# Altium PCB CM5 Nas.PcbDoc (part 4 of 4)
Units mm, origin at the board's own origin, x right, y up, seen from the top; angles counter-clockwise.
Board outline 152.4 x 101.6 mm, 20 copper layers (F.Cu, F.Mask, B.Cu, B.Mask, In1.Cu, F.SilkS, In2.Cu, B.SilkS, F.Adhes, B.Adhes, F.Paste, B.Paste, Dwgs.User, Cmts.User, Eco1.User, Eco2.User, Edge.Cuts, Margin, B.CrtYd, F.CrtYd); 373 components, 619 nets, 1990 pads, 0 vias.
Unrouted connection lines stored in the file: 1086.
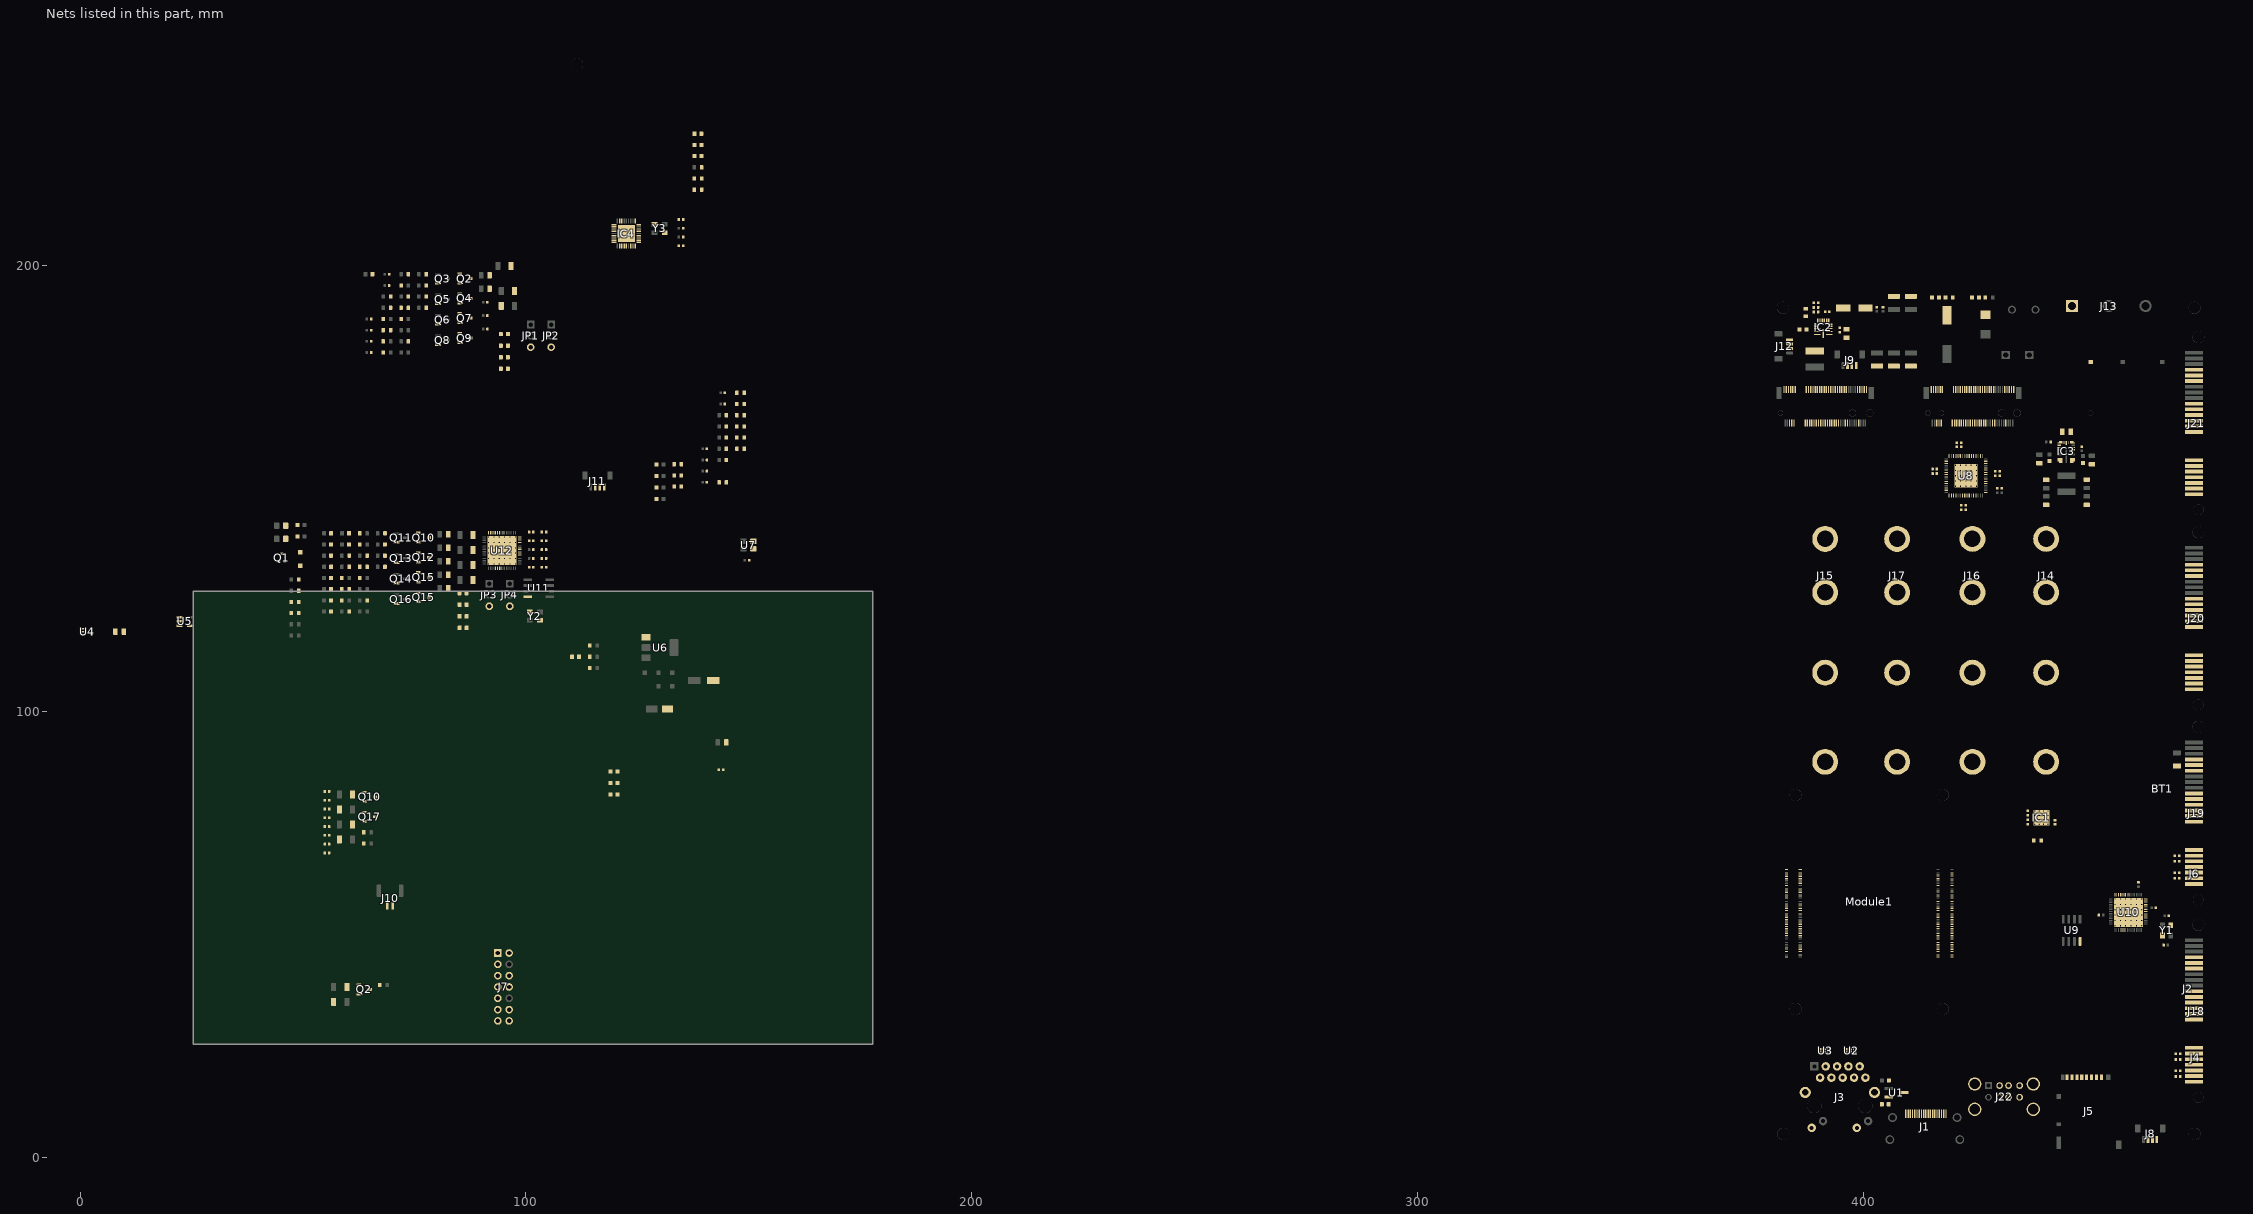
[diagram p13: the nets of this part, all layers, seen from the top]

## Nets (pads, with @x,y where several pads share a name; then routed paths per layer and width w, separated by ;. In a path a pad name is that pad's centre, name@x,y a point inside that pad or via, vN(x,y) a via of type N, cw(c..) or ccw(c..) an arc to the next point about the centre after c; other vN are vias at no path point) (continued)
gnd: BT1.2 C1.2 C2.2 C3.2 C4.2 C5.2 C6.2 C7.2 C8.2 C9.2 C10.2 C11.2 C12.2 C13.2 C14.2 C15.2 C16.2 C17.2 C18.2 C19.2 C20.1 C21.1 C22.2 C23.1 C24.2 C25.2 C26.2 C27.1 C28.2 C29.1 C30.2 C32.2 C34.2 C37.2 C40.2 C41.2 C43.2 C44.2 C45.2 C46.2 C47.2 C48.2 C49.2 C50.2 C51.2 C52.1 C53.2 C54.2 C55.2 C58.2 C59.2 C60.2 C61.2 C62.2 C63.2 C64.2 C69.2 C70.2 C71.2 C72.2 C73.2 C74.2 C77.1 C78.1 C80.2 C81.2 C82.2 C83.2 C84.2 C85.2 C86.2 C87.2 C90.2 C91.2 C92.2 C93.2 C94.2 C95.2 C96.2 C97.2 C98.1@56.86,34.878 C98.2@97.405,194.368 C105.2 C106.1 C107.2 C109.2 C110.2 C111.2 C112.2 C116.2 C117.2 C118.2 C119.2@91.36,188.858 C120.2@65.26,180.568 C121.2 C122.2 C123.2@69.27,195.628 C124.2@101.65,136.348 C125.2 C126.2 C127.1 C134.2 C135.2 C136.1 C137.2 C138.2 C139.2 C140.2 C145.2 C146.2 C147.2 C148.2 C149.2 C150.2 C151.2 C152.2 C153.2 C154.2 C155.2 C156.2 C157.2 C158.2 C159.2 D3.1 D4.1 D5.1 D6.1 D7.1 D8.1 D9.1 D14.1 D15.1 D16.1 D17.1 D18.1 D19.1 D20.1 D21.1 GND1.1 IC1.25 IC1.26 IC1.30 IC1.31 IC1.35 IC1.41 IC2.4 IC2.5 IC2.7 IC2.8 IC2.12 IC2.14 IC3.1 IC3.8 IC3.12 IC3.15 IC3.17 IC3.20 IC4.37 J1.2 J1.5 J1.8 J1.11 J1.17 J2.1 J2.4 J2.7 J2.10 J2.13 J2.16 J2.19 J3.R10 J3.SH J4.2 J5.6 J6.1 J7.1 J7.3 J7.5 J7.7 J7.9 J7.11 J7.13 J8.3 J9.3 J10.2 J11.3 J12.3 J13.1 J14.1 J14.3 J14.9 J14.21 J14.27 J14.33 J14.39 J14.45 J14.51 J14.57 J14.71 J14.73 J14.75 J14.M1 J14.M2 J14.M3 J14.M4 J15.1 J15.3 J15.9 J15.21 J15.27 J15.33 J15.39 J15.45 J15.51 J15.57 J15.71 J15.73 J15.75 J15.M1 J15.M2 J15.M3 J15.M4 J16.1 J16.3 J16.9 J16.21 J16.27 J16.33 J16.39 J16.45 J16.51 J16.57 J16.71 J16.73 J16.75 J16.M1 J16.M2 J16.M3 J16.M4 J17.1 J17.3 J17.9 J17.21 J17.27 J17.33 J17.39 J17.45 J17.51 J17.57 J17.71 J17.73 J17.75 J17.M1 J17.M2 J17.M3 J17.M4 J18.1 J18.4 J18.7 J18.11 J18.13 J18.17 J18.18 J18.19 J19.1 J19.4 J19.7 J19.11 J19.13 J19.17 J19.18 J19.19 J20.1 J20.4 J20.7 J20.11 J20.13 J20.17 J20.18 J20.19 J21.1 J21.4 J21.7 J21.11 J21.13 J21.17 J21.18 J21.19 J22.4 J22.8 JP1.3 JP2.3 JP3.3 JP4.3 Module1.1 Module1.2 Module1.7 Module1.8 Module1.13 Module1.14 Module1.22 Module1.23 Module1.32 Module1.33 Module1.42 Module1.43 Module1.52 Module1.53 Module1.59 Module1.60 Module1.65 Module1.66 Module1.71 Module1.74 Module1.98 Module1.107 Module1.108 Module1.113 Module1.114 Module1.119 Module1.120 Module1.125 Module1.126 Module1.131 Module1.132 Module1.137 Module1.138 Module1.144 Module1.150 Module1.155 Module1.156 Module1.161 Module1.162 Module1.167 Module1.168 Module1.173 Module1.174 Module1.179 Module1.180 Module1.185 Module1.186 Module1.191 Module1.192 Module1.197 Module1.198 Q1.3 Q2.3 Q4.3 Q7.3 Q9.3 Q10.3 Q12.3 Q15.3 Q17.3 R10.2 R13.2 R14.2 R21.2 R22.2 R24.2 R25.2 R26.1 R30.2 R37.2 R38.2 R39.2 R40.2 R41.2 R42.2 R47.2 R52.1 R53.2 R58.2 R65.2 R70.2 R71.1 R76.2 R84.2 R85.1 U1.3 U4.3 U5.2 U6.1 U7.2 U8.53 U8.65 U9.4 U10.56 U10.58 U10.59 U10.65 U11.4 U12.56 U12.58 U12.59 U12.65 Y1.2 Y1.4 Y2.2 Y2.4 Y3.2 Y3.4
GPIO18: Module1.49
GPIO19: Module1.26
GPIO20: Module1.27
GPIO21: Module1.25
GPIO22: Module1.46
GPIO23: Module1.47
GPIO24: Module1.45
GPIO25: J4.6 Module1.41
GPIO26: Module1.24
GPIO27: J4.7 Module1.48
GPIO_VREF: Module1.78 R7.2 R8.2
HDD0_DET: Q2.1 Q4.2 R51.1
HDD1_DET: Q7.2 Q9.1 R56.1
HDD2_DET: Q10.1 Q12.2 R69.1
HDD3_DET: Q15.1@75.84,131.178 Q15.2@75.84,124.678 Q17.1 R74.1@62.705,129.978
HDMI0_CEC: J1.13 Module1.151
HDMI0_CK_N: J1.12 Module1.190
HDMI0_CK_P: J1.10 Module1.188
HDMI0_D0_N: J1.9 Module1.184
HDMI0_D0_P: J1.7 Module1.182
HDMI0_D1_N: J1.6 Module1.178
HDMI0_D1_P: J1.4 Module1.176
HDMI0_D2_N: J1.3 Module1.172
HDMI0_D2_P: J1.1 Module1.170
HDMI0_HOTPLUG: J1.19 Module1.153
HDMI0_SCL: J1.15 Module1.200
HDMI0_SDA: J1.16 Module1.199
HDMI_5v: C2.1 J1.18 U1.2
ID_SC: Module1.35
ID_SD: Module1.36
Net-(C26-Pad1): C26.1 R11.2
Net-(C46-Pad1): C46.1 R27.2
Net-(C47-Pad1): C47.1 R28.2
Net-(C55-Pad1): C55.1 R29.2
Net-(C119-Pad2): C119.2@101.65,140.288
Net-(C120-Pad2): C120.2@101.65,138.318
Net-(C123-Pad2): C123.2@101.65,132.408
Net-(C124-Pad2): C124.2@104.52,140.288
Net-(C129-Pad2): C129.2@104.52,138.318
Net-(C130-Pad2): C130.2@104.52,136.348
Net-(C131-Pad2): C131.2@104.52,134.378
Net-(C132-Pad2): C132.2@104.52,132.408
Net-(D1-K): D1.1 R3.1 TP1.1
Net-(D2-K): D2.1 R4.1 TP2.1
Net-(D3-A): D3.2 R9.1
Net-(D6-A): D6.2 R10.1
Net-(D7-A): D7.2 R16.1
Net-(D8-A): D8.2 R17.1
Net-(D9-A): D9.2 R18.1
Net-(D10-K): D10.1 R46.1
Net-(D11-K): D11.1 R43.1
Net-(D12-K): D12.1 R44.1
Net-(D13-K): D13.1 R45.1
Net-(D14-A): D14.2 R61.2
Net-(D15-A): D15.2 R62.2
Net-(D16-A): D16.2 R63.2
Net-(D17-A): D17.2 R64.2
Net-(D18-A): D18.2 R79.2
Net-(D19-A): D19.2 R80.2
Net-(D20-A): D20.2 R81.2
Net-(D21-A): D21.2 R82.2
Net-(IC1-BST1): C36.1 IC1.12
Net-(IC1-BST2): C33.2 IC1.19
Net-(IC1-BST3): C35.1 IC1.39
Net-(IC1-CMP1): C51.1 IC1.8 R28.1
Net-(IC1-CMP3): C50.1 IC1.3 R27.1
Net-(IC1-COMP2): C22.1 IC1.23 R11.1
Net-(IC1-LX1_1): C36.2 IC1.14 IC1.15 L3.1
Net-(IC1-LX2_1): C33.1 IC1.16 IC1.17 L1.1
Net-(IC1-LX3_1): C35.2 IC1.36 IC1.37 L2.1
Net-(IC1-PGOOD): IC1.27 R12.2
Net-(IC1-RLIM1): IC1.10 R22.1
Net-(IC1-RLIM2): IC1.21 R14.1
Net-(IC1-RLIM3): IC1.1 R21.1
Net-(IC1-ROSC): IC1.6 R26.2
Net-(IC1-SS1): C41.1 IC1.9
Net-(IC1-SS2): C30.1 IC1.22
Net-(IC1-SS3): C40.1 IC1.2
Net-(IC1-V3V): C29.2 IC1.29
Net-(IC1-V7V): C23.2 IC1.28
Net-(IC2-BIAS): C52.2 IC2.13 IC2.16
Net-(IC2-BST): C42.1 IC2.3
Net-(IC2-COMP): C49.1 IC2.15 R29.1
Net-(IC2-FOSC): IC2.17 R30.1
Net-(IC2-LX): C42.2 IC2.6 L4.1
Net-(IC2-{\R\E\S\E\T\}\)\: IC2.2 R23.2
Net-(IC3-CBOOT): C79.2 IC3.3 IC3.4
Net-(IC4-CRFILT): C153.1 C154.1 IC4.14
Net-(IC4-PLLFILT): C158.1 C159.1 IC4.34
Net-(IC4-RBIAS): IC4.35 R85.2
Net-(IC4-USBDM_DN1{slash}PRT_DIS_M1): IC4.1 J22.6
Net-(IC4-USBDM_DN2{slash}PRT_DIS_M2): IC4.3 J22.2
Net-(IC4-USBDP_DN1{slash}PRT_DIS_P1): IC4.2 J22.7
Net-(IC4-USBDP_DN2{slash}PRT_DIS_P2): IC4.4 J22.3
Net-(IC4-VBUS_DET): IC4.27 R83.2
Net-(J3-PadL2): J3.L2 R1.2
Net-(J3-PadL4): J3.L4 R2.2
Net-(J14-DAS{slash}{\D\S\S\}\{\s\l\a\s\h\}\{LED1}): J14.10 R43.2
Net-(J15-DAS{slash}{\D\S\S\}\{\s\l\a\s\h\}\{LED1}): J15.10 R44.2
Net-(J16-DAS{slash}{\D\S\S\}\{\s\l\a\s\h\}\{LED1}): J16.10 R45.2
Net-(J17-DAS{slash}{\D\S\S\}\{\s\l\a\s\h\}\{LED1}): J17.10 R46.2
Net-(J18-P5): J18.12 Q2.2@62.505,36.658 R48.1
Net-(J18-S2): C103.2 J18.2
Net-(J18-S3): C102.2 J18.3
Net-(J18-S5): C101.2 J18.5
Net-(J18-S6): C100.2 J18.6
Net-(J19-P5): J19.12 Q9.2 R60.2
Net-(J19-S2): C115.2 J19.2
Net-(J19-S3): C114.2 J19.3
Net-(J19-S5): C113.2 J19.5
Net-(J19-S6): C108.2 J19.6
Net-(J20-P5): J20.12 Q10.2@63.775,79.838 R66.1
Net-(J20-S2): C132.2@55.825,76.188 J20.2
Net-(J20-S3): C131.2@55.825,78.158 J20.3
Net-(J20-S5): C130.2@55.825,80.128 J20.5
Net-(J20-S6): C129.2@55.825,82.098 J20.6
Net-(J21-P5): J21.12 Q17.2 R78.1
Net-(J21-S2): C144.2 J21.2
Net-(J21-S3): C143.2 J21.3
Net-(J21-S5): C142.2 J21.5
Net-(J21-S6): C141.2 J21.6
Net-(J22-Shield): C157.1 J22.9 R84.1
Net-(Module1A-LED_nACT): Module1.21 R3.2
Net-(Q2-B): Q2.2@85.11,196.148 R49.2@69.615,190.608
Net-(Q3-G): C99.2 Q3.2 Q5.2 R50.2
Net-(Q4-C): Q4.1 R49.1@67.965,188.098 R50.1
Net-(Q6-G): C104.2 Q6.2 Q8.2 R55.2
Net-(Q7-C): Q7.1 R54.1 R55.1
Net-(Q10-B): Q10.2@75.84,138.028 R67.2@60.345,132.488
Net-(Q11-G): C128.2 Q11.2 Q13.2 R68.2
Net-(Q12-C): Q12.1 R67.1@58.695,129.978 R68.1
Net-(Q14-G): C133.2 Q14.2 Q16.2 R73.2
Net-(Q15-B): Q15.2@75.84,129.128 R74.2@64.355,134.998
Net-(Q15-C): Q15.1@75.84,126.728 R72.1 R73.1
Net-(R4-Pad2): R4.2 U4.4
Net-(U2-GND-Pad3): U2.3 U2.8
Net-(U3-GND-Pad3): U3.3 U3.8
Net-(U8-GPIO_0): R35.2 U8.4
Net-(U8-GPIO_1): R31.2 U8.31
Net-(U8-GPIO_2): R38.1 U8.5
Net-(U8-GPIO_3): R34.2 U8.34
Net-(U8-GPIO_4): R37.1 U8.8
Net-(U8-GPIO_5): R32.2 U8.30
Net-(U8-GPIO_6): R39.1 U8.35
Net-(U8-GPIO_7): R33.2 U8.36
Net-(U8-REXT1): R41.1 U8.16
Net-(U8-REXT2): R42.1 U8.49
Net-(U8-TEST_EN): R40.1 U8.33
Net-(U8-TXN_1): C57.2 U8.12
Net-(U8-TXN_2): C66.2 U8.23
Net-(U8-TXN_4): C76.2 U8.58
Net-(U8-TXN_IN): C89.2 U8.55
Net-(U8-TXP_1): C56.2 U8.11
Net-(U8-TXP_2): C65.2 U8.22
Net-(U8-TXP_4): C75.2 U8.57
Net-(U8-TXP_IN): C88.2 U8.54
nPWR_LED: Module1.95 U4.2
nRPIBOOT: J7.2 Module1.93
PCIe_CLK_N_1: J16.53 U8.19
PCIe_CLK_N_2: J17.53 U8.28
PCIe_CLK_N_3: J15.53 U8.45
PCIe_CLK_N_4: J14.53 U8.63
PCIe_CLK_P_1: J16.55 U8.18
PCIe_CLK_P_2: J17.55 U8.27
PCIe_CLK_P_3: J15.55 U8.44
PCIe_CLK_P_4: J14.55 U8.62
PCIE_PWR_EN: Module1.106
PCIe_RX_N_1: J16.41 U8.14
PCIe_RX_N_2: J17.41 U8.25
PCIe_RX_N_3: J15.41 U8.42
PCIe_RX_N_4: J14.41 U8.60
PCIe_RX_P_1: J16.43 U8.13
PCIe_RX_P_2: J17.43 U8.24
PCIe_RX_P_3: J15.43 U8.41
PCIe_RX_P_4: J14.43 U8.59
PCIe_TX_N_1: C57.1 J16.47
PCIe_TX_N_2: C66.1 J17.47
PCIe_TX_N_3: C68.1 J15.47
PCIe_TX_N_4: C76.1 J14.47
PCIe_TX_P_1: C56.1 J16.49
PCIe_TX_P_2: C65.1 J17.49
PCIe_TX_P_3: C67.1 J15.49
PCIe_TX_P_4: C75.1 J14.49
PERST: J14.50 J15.50 J16.50 J17.50 U8.2
PMIC_ENABLE: J7.12 Module1.99
PWM_0: J11.2 Module1.19
PWM_1: J8.2 Module1.31
PWM_2: J9.2 Module1.28
PWM_3: J12.2 Module1.55
PWM_4: Module1.51
PWR_BUT: J7.14 J10.1 Module1.92 Q1.1
RS1: IC3.10 IC3.19 R36.1
S0_RXN: C103.1 U10.39
S0_RXP: C102.1 U10.38
S0_TXN: C100.1 U10.41
S0_TXP: C101.1 U10.42
S1_RXN: C115.1 U10.45
S1_RXP: C114.1 U10.44
S1_TXN: C108.1 U10.47
S1_TXP: C113.1 U10.48
S2_RXN: C124.1@103.56,140.288 C132.1@54.865,76.188 U12.39
S2_RXP: C123.1@100.69,132.408 C131.1@54.865,78.158 U12.38
S2_TXN: C119.1@100.69,140.288 C129.1@54.865,82.098 U12.41
S2_TXP: C120.1@100.69,138.318 C130.1 C142.1 U12.42
S3_RXN: C132.1@103.56,132.408 C144.1 U12.45
S3_RXP: C131.1@103.56,134.378 C143.1 U12.44
S3_TXN: C129.1@103.56,138.318 C141.1 U12.47
S3_TXP: U12.48
SD_CLK: J5.5 Module1.57
SD_CMD: J5.3 Module1.62
SD_DAT0: J5.7 Module1.63
SD_DAT1: J5.8 Module1.67
SD_DAT2: J5.1 Module1.69
SD_DAT3: J5.2 Module1.61
SD_PWR: C3.1 J5.4 U5.1
SD_PWR_ON: Module1.75 U5.4
SUP: C43.1 C44.1 C45.1 C53.1 C54.1 IC2.9 IC2.10 IC2.11
SUSCLK: J14.68 J15.68 J16.68 J17.68 U7.3
SYNC_OUT: J7.6 Module1.18
TACHO: J11.4 Module1.16
TRD0_N: J3.R3 Module1.10 U3.4 U3.7
TRD0_P: J3.R2 Module1.12 U3.5 U3.6
TRD1_N: J3.R5 Module1.6 U3.2 U3.9
TRD1_P: J3.R4 Module1.4 U3.1 U3.10
TRD2_N: J3.R7 Module1.9 U2.4 U2.7
TRD2_P: J3.R6 Module1.11 U2.5 U2.6
TRD3_N: J3.R9 Module1.5 U2.2 U2.9
TRD3_P: J3.R8 Module1.3 U2.1 U2.10
TX_N_3: C68.2 U8.40
TX_P_3: C67.2 U8.39
unconnected-(IC1-SYNC-Pad5): IC1.5
unconnected-(IC4-HS_IND{slash}CFG_SEL1-Pad25): IC4.25
unconnected-(IC4-NC_1-Pad6): IC4.6
unconnected-(IC4-NC_2-Pad7): IC4.7
unconnected-(IC4-NC_3-Pad8): IC4.8
unconnected-(IC4-NC_4-Pad9): IC4.9
unconnected-(IC4-NC_5-Pad18): IC4.18
unconnected-(IC4-NC_6-Pad19): IC4.19
unconnected-(IC4-NC_7-Pad20): IC4.20
unconnected-(IC4-NC_8-Pad21): IC4.21
unconnected-(IC4-OCS_N1-Pad13): IC4.13
unconnected-(IC4-OCS_N2-Pad17): IC4.17
unconnected-(IC4-PRTPWR1{slash}BC_EN1-Pad12): IC4.12
unconnected-(IC4-PRTPWR2{slash}BC_EN2-Pad16): IC4.16
unconnected-(IC4-SCL{slash}SMBCLK{slash}CFG_SEL0-Pad24): IC4.24
unconnected-(IC4-SDA{slash}SMBDATA{slash}NON_REM1-Pad22): IC4.22
unconnected-(IC4-SUSP_IND{slash}LOCAL_PWR{slash}NON_REM0-Pad28): IC4.28
unconnected-(IC4-TEST-Pad11): IC4.11
unconnected-(J1-UTILITY-Pad14): J1.14
unconnected-(J7-Pin_8-Pad8): J7.8
unconnected-(J8-Pin_4-Pad4): J8.4
unconnected-(J9-Pin_4-Pad4): J9.4
unconnected-(J12-Pin_4-Pad4): J12.4
unconnected-(J14-DEVSLP-Pad38): J14.38
unconnected-(J14-NC-Pad6): J14.6
unconnected-(J14-NC-Pad8): J14.8
unconnected-(J14-NC-Pad20): J14.20
unconnected-(J14-NC-Pad22): J14.22
unconnected-(J14-NC-Pad24): J14.24
unconnected-(J14-NC-Pad26): J14.26
unconnected-(J14-NC-Pad28): J14.28
unconnected-(J14-NC-Pad30): J14.30
unconnected-(J14-NC-Pad32): J14.32
unconnected-(J14-NC-Pad34): J14.34
unconnected-(J14-NC-Pad36): J14.36
unconnected-(J14-NC-Pad40): J14.40
unconnected-(J14-NC-Pad42): J14.42
unconnected-(J14-NC-Pad44): J14.44
unconnected-(J14-NC-Pad46): J14.46
unconnected-(J14-NC-Pad48): J14.48
unconnected-(J14-NC-Pad56): J14.56
unconnected-(J14-NC-Pad58): J14.58
unconnected-(J14-NC-Pad67): J14.67
unconnected-(J14-PEDET-Pad69): J14.69
unconnected-(J14-PERn1-Pad35): J14.35
unconnected-(J14-PERn2-Pad23): J14.23
unconnected-(J14-PERn3-Pad11): J14.11
unconnected-(J14-PERp1-Pad37): J14.37
unconnected-(J14-PERp2-Pad25): J14.25
unconnected-(J14-PETn1-Pad29): J14.29
unconnected-(J14-PETn3-Pad5): J14.5
unconnected-(J14-PETp1-Pad31): J14.31
unconnected-(J14-PETp3-Pad7): J14.7
unconnected-(J15-DEVSLP-Pad38): J15.38
unconnected-(J15-NC-Pad6): J15.6
unconnected-(J15-NC-Pad8): J15.8
unconnected-(J15-NC-Pad20): J15.20
unconnected-(J15-NC-Pad22): J15.22
unconnected-(J15-NC-Pad24): J15.24
unconnected-(J15-NC-Pad26): J15.26
unconnected-(J15-NC-Pad28): J15.28
unconnected-(J15-NC-Pad30): J15.30
unconnected-(J15-NC-Pad32): J15.32
unconnected-(J15-NC-Pad34): J15.34
unconnected-(J15-NC-Pad36): J15.36
unconnected-(J15-NC-Pad40): J15.40
unconnected-(J15-NC-Pad42): J15.42
unconnected-(J15-NC-Pad44): J15.44
unconnected-(J15-NC-Pad46): J15.46
unconnected-(J15-NC-Pad48): J15.48
unconnected-(J15-NC-Pad56): J15.56
unconnected-(J15-NC-Pad58): J15.58
unconnected-(J15-NC-Pad67): J15.67
unconnected-(J15-PEDET-Pad69): J15.69
unconnected-(J15-PERn1-Pad35): J15.35
unconnected-(J15-PERn2-Pad23): J15.23
unconnected-(J15-PERn3-Pad11): J15.11
unconnected-(J15-PERp1-Pad37): J15.37
unconnected-(J15-PERp2-Pad25): J15.25
unconnected-(J15-PETn1-Pad29): J15.29
unconnected-(J15-PETn3-Pad5): J15.5
unconnected-(J15-PETp1-Pad31): J15.31
unconnected-(J15-PETp3-Pad7): J15.7
unconnected-(J16-DEVSLP-Pad38): J16.38
unconnected-(J16-NC-Pad6): J16.6
unconnected-(J16-NC-Pad8): J16.8
unconnected-(J16-NC-Pad20): J16.20
unconnected-(J16-NC-Pad22): J16.22
unconnected-(J16-NC-Pad24): J16.24
unconnected-(J16-NC-Pad26): J16.26
unconnected-(J16-NC-Pad28): J16.28
unconnected-(J16-NC-Pad30): J16.30
unconnected-(J16-NC-Pad32): J16.32
unconnected-(J16-NC-Pad34): J16.34
unconnected-(J16-NC-Pad36): J16.36
unconnected-(J16-NC-Pad40): J16.40
unconnected-(J16-NC-Pad42): J16.42
unconnected-(J16-NC-Pad44): J16.44
unconnected-(J16-NC-Pad46): J16.46
unconnected-(J16-NC-Pad48): J16.48
unconnected-(J16-NC-Pad56): J16.56
unconnected-(J16-NC-Pad58): J16.58
unconnected-(J16-NC-Pad67): J16.67
unconnected-(J16-PEDET-Pad69): J16.69
unconnected-(J16-PERn1-Pad35): J16.35
unconnected-(J16-PERn2-Pad23): J16.23
unconnected-(J16-PERn3-Pad11): J16.11
unconnected-(J16-PERp1-Pad37): J16.37
unconnected-(J16-PERp2-Pad25): J16.25
unconnected-(J16-PETn1-Pad29): J16.29
unconnected-(J16-PETn3-Pad5): J16.5
unconnected-(J16-PETp1-Pad31): J16.31
unconnected-(J16-PETp3-Pad7): J16.7
unconnected-(J17-DEVSLP-Pad38): J17.38
unconnected-(J17-NC-Pad6): J17.6
unconnected-(J17-NC-Pad8): J17.8
unconnected-(J17-NC-Pad20): J17.20
unconnected-(J17-NC-Pad22): J17.22
unconnected-(J17-NC-Pad24): J17.24
unconnected-(J17-NC-Pad26): J17.26
unconnected-(J17-NC-Pad28): J17.28
unconnected-(J17-NC-Pad30): J17.30
unconnected-(J17-NC-Pad32): J17.32
unconnected-(J17-NC-Pad34): J17.34
unconnected-(J17-NC-Pad36): J17.36
unconnected-(J17-NC-Pad40): J17.40
unconnected-(J17-NC-Pad42): J17.42
unconnected-(J17-NC-Pad44): J17.44
unconnected-(J17-NC-Pad46): J17.46
unconnected-(J17-NC-Pad48): J17.48
unconnected-(J17-NC-Pad56): J17.56
unconnected-(J17-NC-Pad58): J17.58
unconnected-(J17-NC-Pad67): J17.67
unconnected-(J17-PEDET-Pad69): J17.69
unconnected-(J17-PERn1-Pad35): J17.35
unconnected-(J17-PERn2-Pad23): J17.23
unconnected-(J17-PERn3-Pad11): J17.11
unconnected-(J17-PERp1-Pad37): J17.37
unconnected-(J17-PERp2-Pad25): J17.25
unconnected-(J17-PETn1-Pad29): J17.29
unconnected-(J17-PETn3-Pad5): J17.5
unconnected-(J17-PETp1-Pad31): J17.31
unconnected-(J17-PETp3-Pad7): J17.7
unconnected-(J18-P1-Pad8): J18.8
unconnected-(J18-P2-Pad9): J18.9
unconnected-(J18-P3-Pad10): J18.10
unconnected-(J19-P1-Pad8): J19.8
unconnected-(J19-P2-Pad9): J19.9
unconnected-(J19-P3-Pad10): J19.10
unconnected-(J20-P1-Pad8): J20.8
unconnected-(J20-P2-Pad9): J20.9
unconnected-(J20-P3-Pad10): J20.10
unconnected-(J21-P1-Pad8): J21.8
unconnected-(J21-P2-Pad9): J21.9
unconnected-(J21-P3-Pad10): J21.10
unconnected-(Module1A-+1.8v_(Output)-Pad88): Module1.88
unconnected-(Module1A-+1.8v_(Output)-Pad90): Module1.90
unconnected-(Module1A-CC1-Pad94): Module1.94
unconnected-(Module1A-CC2-Pad96): Module1.96
unconnected-(Module1A-SD_DAT4-Pad68): Module1.68
unconnected-(Module1A-SD_DAT5-Pad64): Module1.64
unconnected-(Module1A-SD_DAT6-Pad72): Module1.72
unconnected-(Module1A-SD_DAT7-Pad70): Module1.70
unconnected-(Module1A-SD_VDD_Override-Pad73): Module1.73
unconnected-(Module1B-HDMI1_CEC-Pad149): Module1.149
unconnected-(Module1B-HDMI1_CLK_N-Pad166): Module1.166
unconnected-(Module1B-HDMI1_CLK_P-Pad164): Module1.164
unconnected-(Module1B-HDMI1_HOTPLUG-Pad143): Module1.143
unconnected-(Module1B-HDMI1_SCL-Pad147): Module1.147
unconnected-(Module1B-HDMI1_SDA-Pad145): Module1.145
unconnected-(Module1B-HDMI1_TX0_N-Pad160): Module1.160
unconnected-(Module1B-HDMI1_TX0_P-Pad158): Module1.158
unconnected-(Module1B-HDMI1_TX1_N-Pad154): Module1.154
unconnected-(Module1B-HDMI1_TX1_P-Pad152): Module1.152
unconnected-(Module1B-HDMI1_TX2_N-Pad148): Module1.148
unconnected-(Module1B-HDMI1_TX2_P-Pad146): Module1.146
unconnected-(Module1B-MIPI1_C_N-Pad187): Module1.187
unconnected-(Module1B-MIPI1_C_P-Pad189): Module1.189
unconnected-(Module1B-MIPI1_D0_N-Pad175): Module1.175
unconnected-(Module1B-MIPI1_D0_P-Pad177): Module1.177
unconnected-(Module1B-MIPI1_D1_N-Pad181): Module1.181
unconnected-(Module1B-MIPI1_D1_P-Pad183): Module1.183
unconnected-(Module1B-MIPI1_D2_N-Pad193): Module1.193
unconnected-(Module1B-MIPI1_D2_P-Pad195): Module1.195
unconnected-(Module1B-MIPI1_D3_N-Pad194): Module1.194
unconnected-(Module1B-MIPI1_D3_P-Pad196): Module1.196
unconnected-(Module1B-USB3-0-D_N-Pad136): Module1.136
unconnected-(Module1B-USB3-0-D_P-Pad134): Module1.134
unconnected-(Module1B-USB3-1-D_N-Pad165): Module1.165
unconnected-(Module1B-USB3-1-D_P-Pad163): Module1.163
unconnected-(U4-nc-Pad1): U4.1
unconnected-(U5-nFLG-Pad3): U5.3
unconnected-(U8-MSCLK-Pad6): U8.6
unconnected-(U8-MSDA-Pad7): U8.7
unconnected-(U10-FB-Pad64): U10.64
unconnected-(U10-LDO-3V3-Pad22): U10.22
unconnected-(U10-LDO-5VIN-Pad21): U10.21
unconnected-(U10-REG-SW-Pad60): U10.60
unconnected-(U10-REG-SW-Pad61): U10.61
unconnected-(U10-REG-VIN-Pad62): U10.62
unconnected-(U10-REG-VIN-Pad63): U10.63
unconnected-(U12-DM-Pad23): U12.23
unconnected-(U12-DP-Pad24): U12.24
unconnected-(U12-FB-Pad64): U12.64
unconnected-(U12-LDO-3V3-Pad22): U12.22
unconnected-(U12-LDO-5VIN-Pad21): U12.21
unconnected-(U12-REG-SW-Pad60): U12.60
unconnected-(U12-REG-SW-Pad61): U12.61
unconnected-(U12-REG-VIN-Pad62): U12.62
unconnected-(U12-REG-VIN-Pad63): U12.63
VBAT: BT1.1 Module1.76
VBUS_EN: Module1.111
VCC: C90.1 IC3.6 IC3.9 IC3.11 IC3.18
WL_nDis: Module1.89
pads on no net: H1.Un1 H2.Un1 H3.Un1 H4.Un1 H5.Un1 IC1.Un1 IC1.Un2 IC1.Un3 IC1.Un4 IC1.Un5 IC1.Un6 IC1.Un7 IC1.Un8 IC1.Un9 J1.S1 J1.S2 J1.S3 J1.S4 J2.MP J3.Un1 J3.Un2 J4.MP J5.MP1 J5.MP2 J5.MP3 J5.MP4 J5.MP5 J5.MP6 J6.S1 J6.S2 J8.MP J9.MP J10.MP J11.MP J12.MP J14.59 J14.60 J14.61 J14.62 J14.63 J14.64 J14.65 J14.66 J14.76 J14.77 J14.Un1 J14.Un2 J15.59 J15.60 J15.61 J15.62 J15.63 J15.64 J15.65 J15.66 J15.76 J15.77 J15.Un1 J15.Un2 J16.59 J16.60 J16.61 J16.62 J16.63 J16.64 J16.65 J16.66 J16.76 J16.77 J16.Un1 J16.Un2 J17.59 J17.60 J17.61 J17.62 J17.63 J17.64 J17.65 J17.66 J17.76 J17.77 J17.Un1 J17.Un2 J18.Un1 J18.Un2 J19.Un1 J19.Un2 J20.Un1 J20.Un2 J21.Un1 J21.Un2 Module1.Un1 Module1.Un2 Module1.Un3 Module1.Un4 U8.Un1 U8.Un2 U8.Un3 U8.Un4 U8.Un5 U8.Un6 U8.Un7 U8.Un8 U8.Un9 U8.Un10 U8.Un11 U8.Un12 U8.Un13 U8.Un14 U8.Un15 U8.Un16 U10.Un1 U10.Un2 U10.Un3 U10.Un4 U10.Un5 U10.Un6 U10.Un7 U10.Un8 U10.Un9 U10.Un10 U10.Un11 U10.Un12 U10.Un13 U10.Un14 U10.Un15 U10.Un16 U10.Un17 U10.Un18 U10.Un19 U10.Un20 U10.Un21 U10.Un22 U10.Un23 U10.Un24 U10.Un25 U12.Un1 U12.Un2 U12.Un3 U12.Un4 U12.Un5 U12.Un6 U12.Un7 U12.Un8 U12.Un9 U12.Un10 U12.Un11 U12.Un12 U12.Un13 U12.Un14 U12.Un15 U12.Un16 U12.Un17 U12.Un18 U12.Un19 U12.Un20 U12.Un21 U12.Un22 U12.Un23 U12.Un24 U12.Un25
copper on no net: | length 881.6
  Cmts.User w0.254: 275.77,118.738 345.77,118.738 345.77,198.738 275.77,198.738 275.77,118.738
  Edge.Cuts w0.254: 378.17,3.988 ccw(c380.71,3.988) 380.71,1.448 475.63,1.438 ccw(c475.63,3.978) 478.17,3.978 478.17,191.898 ccw(c475.63,191.898) 475.63,194.438 380.71,194.438 ccw(c380.71,191.898) 378.17,191.898 378.17,3.988

## Other copper
F.Cu:
  region: 389.774,187.518 389.52,187.518 389.52,187.906 389.774,187.906
  region: 451.041,147.871 440.146,147.871 440.146,150.611 441.797,150.611 443.575,150.103 447.639,150.103 449.417,150.611 451.041,150.611
B.Cu:
  region: 440.213,69.454 438.714,69.454 438.714,69.886 439.628,69.886 439.628,71.334 440.213,71.334
  region: 439.628,69.454 438.714,69.454 438.714,69.886 439.628,70.8
F.SilkS:
  text "5V" at 412.689,192.124 h1
  text "12V" at 420.88,191.868 h1
  text "5V" at 453.27,176.767 h2.2
  text "12V" at 460.67,176.764 h2.2
  text "GND" at 443.17,176.661 h2.2
  text "Battery / CR2032" at 466.3,71.848 h1
  text "Compute Module 5" at 396.65,52.758 h2
B.SilkS:
  text "Battery / CR2032" at 475.64,70.578 h1
Dwgs.User:
  text "Bottom View" at 371.298,213.879 h3
  text "Top View" at 242.547,213.597 h3
Cmts.User:
  text "Change two 3 pin" at 298.16,200.406 h1
  text "PCB3D_TL_BOARDNAME" at 270.031,198.406 h1
  text "CHANGE to 0402" at 153.38,159.862 h1
  text "PCB3D_BR_BOARDNAME" at 345.77,118.406 h1
  text "Change two 3 pin" at 458.27,8.736 h1

## Silkscreen, mask and mechanical layers (free items; w line width, h text height)
User.9:
  region: 276.27,125.488 275.27,125.488 275.77,126.488
  region: 282.02,120.238 281.02,119.738 281.02,120.738
  lines w0.254: 275.77,126.238 275.77,120.238 281.77,120.238 ; 372.77,195.238 410.77,195.238 ; 372.77,204.238 410.77,204.238
  text "Bottom Test Points (Scale 1:1)" at 321.814,213.588 h3
  text "Net" at 402.77,204.956 h1
  text "Ref." at 410.77,204.952 h1
  text "Y [mm]" at 378.77,204.863 h1
  text "X [mm]" at 386.77,204.863 h1
  text "??? / ??? / ???" at 378.77,201.277 h1
  text "??? / ??? / ???" at 386.77,201.277 h1
  text "??? / ??? / ???" at 402.77,201.277 h1
  text "TP? / TP? / TP?" at 410.77,201.277 h1
  text "Y" at 275.894,127.461 h1
  text "X" at 283.41,119.961 h1
  text "All dimensions are in millimeters unless otherwise specified." at 325.328,96.478 h2
User.8:
  region: 282.02,120.238 281.02,119.738 281.02,120.738
  region: 276.27,125.488 275.27,125.488 275.77,126.488
  lines w0.254: 210.77,195.738 248.77,195.738 ; 210.77,204.238 248.77,204.238 ; 275.77,126.238 275.77,120.238 281.77,120.238
  text "Top Test Points (Scale 1:1)" at 300.975,213.588 h3
  text "Ref." at 210.77,204.952 h1
  text "Net" at 218.77,204.956 h1
  text "X [mm]" at 234.77,204.863 h1
  text "Y [mm]" at 242.77,204.863 h1
  text "TP? / TP? / TP?" at 210.77,201.277 h1
  text "??? / ??? / ???" at 218.77,201.277 h1
  text "??? / ??? / ???" at 234.77,201.277 h1
  text "??? / ??? / ???" at 242.77,201.277 h1
  text "Y" at 275.646,127.461 h1
  text "X" at 283.13,119.961 h1
  text "All dimensions are in millimeters unless otherwise specified." at 296.212,96.478 h2
User.7:
  text "Bottom Fabrication (Scale 1:1)" at 321.801,213.588 h3
  text "All dimensions are in millimeters unless otherwise specified." at 325.328,96.478 h2
User.6:
  drawing of 241 lines, arcs and shapes, not listed
  text "Top Fabrication (Scale 1:1)" at 300.988,213.588 h3
  text "Layer Stack Legend" at 179.52,198.089 h3
  text "Dielectric  / Material" at 241.77,191.611 h1
  text "Material" at 203.67,191.202 h1
  text "Thickness" at 227.27,191.202 h1
  text "Gerber" at 267.52,191.202 h1
  text "Layer" at 213.77,191.11 h1
  text "Type" at 254.02,191.11 h1
  text "F.Paste" at 213.77,187.456 h1
  text "Paste Mask" at 254.02,187.456 h1
  text "GBR" at 267.52,187.453 h1
  text "F.Silkscreen" at 213.77,185.202 h1
  text "GBR" at 267.52,185.203 h1
  text "Legend" at 254.02,185.109 h1
  text "F.Mask" at 213.77,182.956 h1
  text "Solder Resist" at 241.77,182.952 h1
  text "Solder Mask" at 254.02,182.952 h1
  text "GBR" at 267.52,182.953 h1
  text "GBR" at 267.52,180.203 h1
  text "Copper" at 203.67,180.108 h1
  text "L1 (Sig, PWR)" at 213.77,180.105 h1
  text "???mm (?oz)" at 227.27,180.107 h1
  text "Signal" at 254.02,180.106 h1
  text "???mm" at 227.27,176.705 h1
  text "FR-4" at 241.77,176.708 h1
  text "Dielectric" at 254.02,176.702 h1
  text "Prepreg" at 203.77,176.609 h1
  text "Internal Plane" at 254.02,173.456 h1
  text "GBR" at 267.52,173.453 h1
  text "Copper" at 203.77,173.358 h1
  text "L2 (GND)" at 213.77,173.355 h1
  text "???mm (?oz)" at 227.27,173.357 h1
  text "???mm" at 227.27,169.205 h1
  text "FR-4" at 241.77,169.208 h1
  text "Core" at 203.77,169.202 h1
  text "Dielectric" at 254.02,169.202 h1
  text "GBR" at 267.52,164.953 h1
  text "Copper" at 203.77,164.858 h1
  text "L3 (Sig, PWR)" at 213.77,164.855 h1
  text "???mm (?oz)" at 227.27,164.857 h1
  text "Signal" at 254.02,164.856 h1
  text "???mm" at 227.27,161.705 h1
  text "FR-4" at 241.77,161.708 h1
  text "Dielectric" at 254.02,161.702 h1
  text "Prepreg" at 203.77,161.609 h1
  text "GBR" at 267.52,158.453 h1
  text "Copper" at 203.77,158.358 h1
  text "???mm (?oz)" at 227.27,158.357 h1
  text "L4 (Sig, PWR)" at 213.77,158.355 h1
  text "Signal" at 254.02,158.356 h1
  text "Core" at 203.77,154.202 h1
  text "???mm" at 227.27,154.205 h1
  text "FR-4" at 241.77,154.208 h1
  text "Dielectric" at 254.02,154.202 h1
  text "Internal Plane" at 254.02,149.956 h1
  text "GBR" at 267.52,149.953 h1
  text "Copper" at 203.77,149.858 h1
  text "L5 (GND)" at 213.77,149.855 h1
  text "???mm (?oz)" at 227.27,149.857 h1
  text "???mm" at 227.27,146.705 h1
  text "Prepreg" at 203.77,146.609 h1
  text "FR-4" at 241.77,146.458 h1
  text "Dielectric" at 254.02,146.452 h1
  text "GBR" at 267.52,143.203 h1
  text "Copper" at 203.77,143.108 h1
  text "L6 (Sig, PWR)" at 213.77,143.105 h1
  text "???mm (?oz)" at 227.27,143.107 h1
  text "Signal" at 254.02,143.106 h1
  text "B.Mask" at 213.77,140.456 h1
  text "Solder Resist" at 241.77,140.452 h1
  text "Solder Mask" at 254.02,140.452 h1
  text "GBR" at 267.52,140.453 h1
  text "B.Silkscreen" at 213.77,138.202 h1
  text "GBR" at 267.52,138.203 h1
  text "Legend" at 254.02,138.109 h1
  text "B.Paste" at 213.77,135.956 h1
  text "Paste Mask" at 254.02,135.956 h1
  text "GBR" at 267.52,135.953 h1
  text "Total thickness: 1.62mm" at 202.77,132.202 h1
  text "Note: external layer thicknesses are specified after plating." at 202.77,128.856 h1
  text "All dimensions are in millimeters unless otherwise specified." at 296.212,96.478 h2
  text "FABRICATION NOTES (UNLESS OTHERWISE SPECIFIED) /  / 1) 	OUTLINE DEFINED IN SEPARATE GERBER FILE WITH  / 	{dblquote}Edge_Cuts.GBR{dblquote} SUFFIX.  / 	DIMENSIONS OF CIRCUMSIZED RECTANGLE SHOWN  / 	ON THIS DWG FOR REF ONLY. /  / 2) 	SEE SEPARATE DRILL FILES WITH {dblquote}.DRL{dblquote} SUFFIX FOR HOLE LOCATIONS. / 	SELECTED HOLE LOCATIONS SHOWN ON THIS DWG FOR REF ONLY. /  / 3)	IMPEDANCE CONTROL REQUIRED. / 	Microstrip 100-Ohm Differential (L1 ref. L2) / 	0.2032mm width, 0.28mm spacing /  / 4) 	CONFIRM TRACE WIDTHS AND SPACINGS. /  / 5)	DESIGN GEOMETRY MINIMUM FEATURE SIZES: / 	TRACE WIDTH			??? mm		 / 	TRACE TO TRACE		??? mm / 	MIN. HOLE (PTH)		??? mm		 / 	MIN. HOLE (NPTH)	??? mm / 	ANNULAR RING		??? mm		 / 	COPPER TO HOLE		??? mm	 / 	COPPER TO EDGE		??? mm		 / 	HOLE TO HOLE		??? mm" at 181.27,45.973 h1.5
User.5:
  text "Bottom Assembly (Scale 1:1)" at 321.023,213.588 h3
User.4:
  lines w0.254: 189.27,171.238 224.27,171.238 ; 189.27,182.238 224.27,182.238
  text "Top Assembly (Scale 1:1)" at 301.766,213.588 h3
  text "Components" at 188.27,189.097 h3
  text "Front Side" at 199.27,182.952 h1
  text "Back Side" at 209.27,182.952 h1
  text "Total" at 219.27,182.956 h1
  text "Type" at 189.27,182.86 h1
  text "THT /  / SMD /  / Total" at 189.27,178.618 h1
  text "??? /  / ??? /  / ???" at 199.27,178.613 h1
  text "??? /  / ??? /  / ???" at 209.27,178.613 h1
  text "??? /  / ??? /  / ???" at 219.27,178.613 h1
  text "ASSEMBLY NOTES (UNLESS OTHERWISE SPECIFIED) /  / 1) 	DO NOT POPULATE PARTS ARE MARKED WITH A RED CROSS. /  / 2) 	DO NOT POPULATE PARTS ARE NOT PRESENT IN THE BOM. /  / 3)	IF CONFLICTING INFORMATION IS FOUND BETWEEN THE / 	ASSEMBLY FILE AND BOM, BOM SHOULD BE USED AS THE / 	MAIN SOURCE." at 189.27,134.17 h1.5
User.1:
  circle w0.254: c212.145,172.688 r0.35
  circle w0.254: c212.145,198.463 r0.125
  circle w0.254: c212.145,185.563 r0.5
  lines w0.254: 210.77,170.338 243.57,170.338 ; 210.77,204.238 243.57,204.238 ; 211.145,174.938 213.145,176.938 ; 211.145,176.938 213.145,174.938 ; 211.145,178.138 213.145,180.138 ; 211.145,180.138 213.145,178.138 ; 211.395,181.613 212.895,183.113 ; 211.395,182.363 212.895,182.363 ; 211.395,183.113 212.895,181.613 ; 211.645,185.063 212.645,186.063 ; 211.645,186.063 212.645,185.063 ; 211.795,172.688 212.495,172.688 ; 211.995,195.238 212.295,195.238 ; 212.02,201.553 212.27,201.803 ; 212.02,201.803 212.27,201.553 ; 212.145,172.338 212.145,173.038 ; 212.145,181.613 212.145,183.113 ; 212.145,195.088 212.145,195.388 ; 211.145,175.938 212.145,176.938 213.145,175.938 212.145,174.938 211.145,175.938 ; 211.438,178.431 212.852,178.431 212.852,179.845 211.438,179.845 211.438,178.431 ; 211.845,188.788 212.145,189.088 212.445,188.788 212.145,188.488 211.845,188.788 ; 211.968,191.836 211.968,192.19 212.322,192.19 212.322,191.836 211.968,191.836
  text "Drill Drawing (Top View) (Scale 1:1)" at 297.659,213.588 h3
  text "Hole Size" at 226.72,205.052 h1
  text "Plated" at 236.695,205.056 h1
  text "Count" at 218.72,205.027 h1
  text "Symbol" at 210.745,204.906 h1
  text "???mm /  / ???mm /  / ???mm /  / ???mm /  / ???mm /  / ???mm /  / ???mm /  / ???mm /  / ???mm /  / ???mm" at 226.72,196.015 h1
  text "Plated /  / Plated /  / Plated /  / Plated /  / Plated /  / Plated /  / Plated /  / Plated /  / Plated /  / Unplated" at 236.72,195.956 h1
  text "??? /  / ??? /  / ??? /  / ??? /  / ??? (slot) /  / ??? /  / ??? /  / ??? /  / ??? /  / ???" at 218.745,195.842 h1

## Text inside footprints (layer, text, board x,y; h text height)
J1: F.Fab "PCB EDGE" at 422.371,1.503 h0.8
J14: B.SilkS "2242" at 431.044,125.968 h1; B.SilkS "2280" at 431.044,90.463 h1; B.SilkS "2242" at 451.044,126.968 h1; B.SilkS "2230" at 450.794,138.963 h1; B.SilkS "2260" at 451.044,108.963 h1; B.SilkS "2260" at 431.044,107.963 h1; B.SilkS "2280" at 451.044,88.963 h1; B.SilkS "2230" at 431.044,137.963 h1
J15: F.SilkS "2260" at 401.474,107.96 h1; F.SilkS "2230" at 401.474,137.96 h1; F.SilkS "2242" at 381.474,126.965 h1; F.SilkS "2230" at 381.724,138.96 h1; F.SilkS "2242" at 401.474,125.965 h1; F.SilkS "2280" at 381.474,88.96 h1; F.SilkS "2280" at 401.474,90.46 h1; F.SilkS "2260" at 381.474,108.96 h1
J16: F.SilkS "2230" at 414.764,138.963 h1; F.SilkS "2280" at 414.514,88.963 h1; F.SilkS "2242" at 414.514,126.968 h1; F.SilkS "2230" at 434.514,137.963 h1; F.SilkS "2242" at 434.514,125.968 h1; F.SilkS "2260" at 434.514,107.963 h1; F.SilkS "2260" at 414.514,108.963 h1; F.SilkS "2280" at 434.514,90.463 h1
J17: B.SilkS "2280" at 397.604,90.46 h1; B.SilkS "2242" at 397.604,125.965 h1; B.SilkS "2242" at 417.604,126.965 h1; B.SilkS "2260" at 397.604,107.96 h1; B.SilkS "2230" at 397.604,137.96 h1; B.SilkS "2260" at 417.604,108.96 h1; B.SilkS "2230" at 417.354,138.96 h1; B.SilkS "2280" at 417.604,88.96 h1